# Altium PCB K10P100最小系统V1.0.PcbDoc (part 2 of 2)
Units mm, origin at the board's own origin, x right, y up, seen from the top; angles counter-clockwise.
Board outline 152.4 x 101.6 mm, 2 copper layers (Top Layer, Bottom Layer); 129 components, 121 nets, 483 pads, 257 vias.
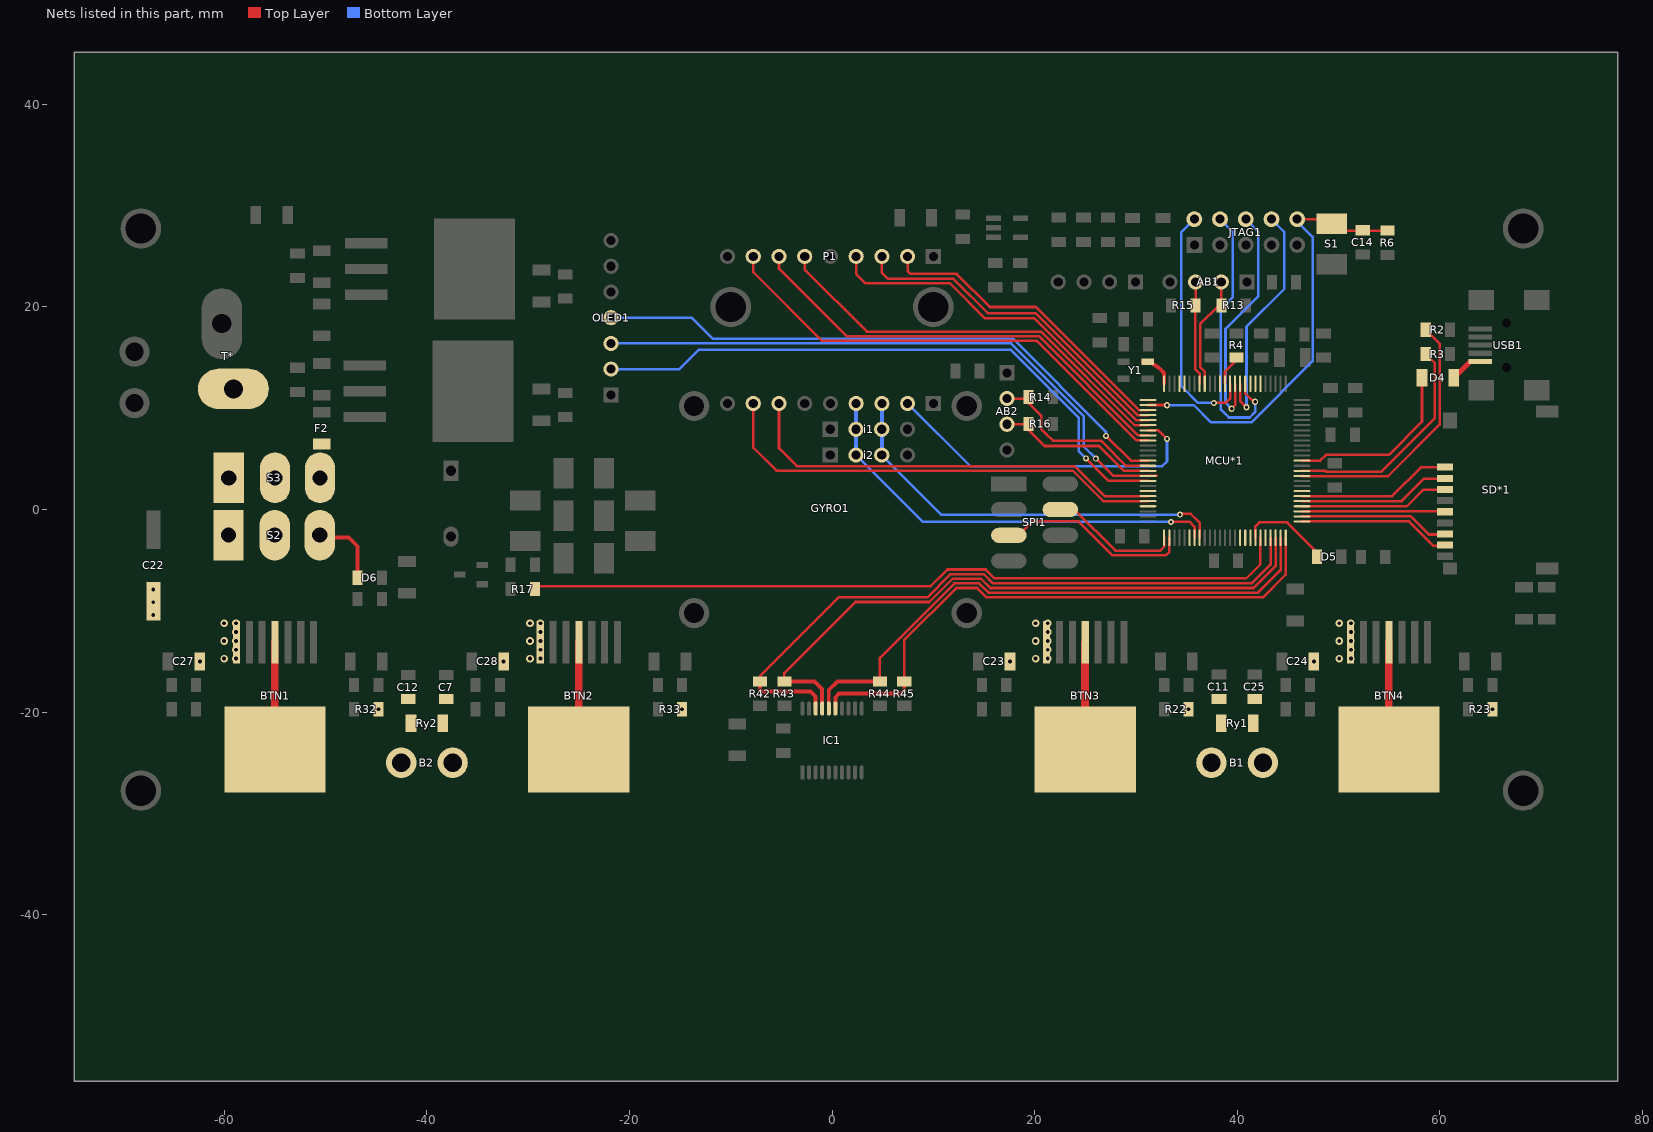
[diagram p2: the nets of this part, all layers, seen from the top]

## Via types
v1: diameter 0.762, hole 0.381, Top Layer to Bottom Layer, 136 vias
v2: diameter 0.864, hole 0.508, Top Layer to Bottom Layer, 83 vias
v3: diameter 0.61, hole 0.33, Top Layer to Bottom Layer, 25 vias
v4: diameter 0.864, hole 0.381, Top Layer to Bottom Layer, 9 vias
v5: diameter 1, hole 1, Top Layer to Bottom Layer, 2 vias
v6: diameter 0.457, hole 0.3, Top Layer to Bottom Layer, 1 vias
v7: diameter 0.61, hole 0.381, Top Layer to Bottom Layer, 1 vias

## Nets (pads, with @x,y where several pads share a name; then routed paths per layer and width w, separated by ;. In a path a pad name is that pad's centre, name@x,y a point inside that pad or via, vN(x,y) a via of type N, cw(c..) or ccw(c..) an arc to the next point about the centre after c; other vN are vias at no path point) (continued)
OLEDDC: MCU*1.67 OLED1.2 | length 61.1
  Top Layer w0.254: v3(25.075,5.05) 27.3,2.825 MCU*1.67@31.2,2.825
  Bottom Layer w0.254: OLED1.2@-21.825,13.865 -15.082,13.865 -13.159,15.787 17.641,15.787 24.35,9.078 24.35,5.775 v3(25.075,5.05)
OLEDMISO: MCU*1.63 OLED1.4 | length 59.1
  Top Layer w0.254: v3(27.05,7.275) 29.5,4.825 MCU*1.63@31.2,4.825
  Bottom Layer w0.254: OLED1.4@-21.825,18.945 -13.87,18.945 -11.8,16.875 17.85,16.875 27.05,7.675 v3(27.05,7.275)
OLEDRST: MCU*1.66 OLED1.3 | length 61
  Top Layer w0.254: v3@26.063,5.037 27.775,3.325 MCU*1.66@31.2,3.325 32.033,3.325
  Bottom Layer w0.254: OLED1.3@-21.825,16.405 17.67,16.405 24.85,9.225 24.85,6.25 v3@26.063,5.037
  other v3: 26.05,5.025
OUT1: B2.1 BTN1.4 BTN1.8 C12.1 Ry2.1 | length 10.6
  Top Layer w0.762: BTN1.8@-55.025,-23.684 BTN1.4@-55.025,-13.123
OUT2: B2.2 BTN2.4 BTN2.8 C7.1 Ry2.2 | length 10.6
  Top Layer w0.762: BTN2.8@-25.025,-23.684 BTN2.4@-25.025,-13.123
OUT3: B1.1 BTN3.4 BTN3.8 C11.1 Ry1.1 | length 10.6
  Top Layer w0.762: BTN3.8@24.975,-23.684 BTN3.4@24.975,-13.123
OUT4: B1.2 BTN4.4 BTN4.8 C25.2 Ry1.2 | length 10.6
  Top Layer w0.762: BTN4.8@54.975,-23.684 BTN4.4@54.975,-13.123
PCS0: MCU*1.76 SPI1.6 | length 13
  Top Layer w0.254: SPI1.6@22.538,-0.003 22.56,-0.025 23.95,-0.025 27.975,-4.05 32.425,-4.05 32.8,-3.675 MCU*1.76@32.8,-2.775
PTA0: JTAG1.4 MCU*1.34 | length 27.2
  Top Layer w0.254: MCU*1.34@40.8,12.425 40.8,11.45 41.6,10.65 v3(41.775,10.65)
  Bottom Layer w0.254: JTAG1.4@38.31,28.67 39.55,27.43 39.55,20.95 38.393,19.793 38.393,9.882 39.185,9.09 40.813,9.09 ; 40.798,9.075 40.813,9.09 ; v3@41.6,10.65 v3(41.775,10.65) 41.775,9.622 41.243,9.09 40.813,9.09
PTA1: JTAG1.8 MCU*1.35 | length 23.2
  Top Layer w0.254: MCU*1.35@40.3,12.425 40.3,10.719 v3(40.922,10.097)
  Bottom Layer w0.254: v3(40.922,10.097) 40.922,18.072 44.65,21.8 44.65,27.41 JTAG1.8@43.39,28.67
PTA2: JTAG1.6 MCU*1.36 | length 23.5
  Top Layer w0.254: v3(39.45,9.95) 39.8,10.3 39.8,10.975 MCU*1.36@39.8,12.425
  Bottom Layer w0.254: v3(39.45,9.95) 38.85,10.55 38.85,17.85 42.1,21.1 42.1,27.42 JTAG1.6@40.85,28.67
PTA3: JTAG1.2 MCU*1.37 | length 24.2
  Top Layer w0.254: v3(37.7,10.525) 38.85,10.525 39.3,10.975 ; 39.3,10.925 39.3,10.975 ; MCU*1.37@39.3,12.425 39.3,10.975
  Bottom Layer w0.254: JTAG1.2@35.77,28.67 34.5,27.4 34.5,12.175 36.15,10.525 v3(37.7,10.525)
PTA4: MCU*1.38 R4.2 | length 3.1
  Top Layer w0.254: MCU*1.38@38.8,12.425 38.8,13.625 39.95,14.775 R4.2@39.95,15
PTA5: MCU*1.39
PTA12: AB1.2 MCU*1.42 R13.1 | length 11.6
  Top Layer w0.254: MCU*1.42@36.8,12.425 36.8,13.625 36.35,14.075 36.35,18.3 38.185,20.135 R13.1@38.435,20.135 ; AB1.2@38.435,22.475 R13.1@38.435,20.135 ; R13.1@38.45,20.15 R13.1@38.435,20.135 ; R13.1@38.475,19.85 38.435,19.89 R13.1@38.435,20.135
PTA13: AB1.3 MCU*1.43 R15.1 | length 10.2
  Top Layer w0.254: AB1.3@35.895,22.475 35.895,20.17 R15.1@35.875,20.15 35.875,13.85 36.3,13.425 MCU*1.43@36.3,12.425
PTA16: MCU*1.46
PTA17: MCU*1.47
PTA18: MCU*1.50 Y1.3 | length 3.5
  Top Layer w0.381: Y1.3@30.7,14.576 cw(c30.7,12.163) 32.406,13.869 32.675,13.6 cw(c32.373,13.298) 32.8,13.298 MCU*1.50@32.8,12.425
PTA19: MCU*1.51
PTB0: MCU*1.53 P1.2 | length 30.9
  Top Layer w0.254: P1.2@7.46,25 7.46,23.54 7.725,23.275 12.3,23.275 15.575,20 20.136,20 30.311,9.825 MCU*1.53@31.2,9.825
PTB1: MCU*1.54 P1.3 | length 33.7
  Top Layer w0.254: P1.3@4.92,25 4.92,23.38 5.513,22.787 11.988,22.787 15.375,19.4 20.09,19.4 30.165,9.325 MCU*1.54@31.2,9.325
PTB2: MCU*1.55 P1.4 | length 36.5
  Top Layer w0.254: P1.4@2.38,25 2.38,23.245 3.295,22.33 11.67,22.33 15.125,18.875 19.968,18.875 30.018,8.825 MCU*1.55@31.2,8.825
PTB3: MCU*1.56 P1.6 | length 41.6
  Top Layer w0.254: P1.6@-2.7,25 -2.7,23.725 3.45,17.575 20.622,17.575 29.872,8.325 MCU*1.56@31.2,8.325
PTB9: GYRO1.2 MCU*1.57 | length 32.8
  Top Layer w0.254: MCU*1.57@31.2,7.825 32.225,7.825 v3(33.075,6.975)
  Bottom Layer w0.254: GYRO1.2@7.46,10.475 13.66,4.275 32.6,4.275 33.075,4.75 v3(33.075,6.975)
PTB10: MCU*1.58 P1.7 | length 44.5
  Top Layer w0.254: P1.7@-5.24,25 -5.24,23.79 1.432,17.118 20.432,17.118 30.225,7.325 MCU*1.58@31.2,7.325
PTB11: MCU*1.59 P1.8 | length 47.4
  Top Layer w0.254: P1.8@-7.78,25 -7.78,23.455 -0.986,16.661 20.214,16.661 30.05,6.825 MCU*1.59@31.2,6.825
PTB18: AB2.2 MCU*1.64 R14.1 | length 17.9
  Top Layer w0.254: AB2.2@17.275,10.96 19.26,10.96 R14.1@19.4,11.1 19.4,10.5 20.675,9.225 20.675,7.922 20.97,7.627 20.97,7.613 21.163,7.42 21.177,7.42 21.797,6.8 26.55,6.8 29.035,4.315 31.19,4.315 MCU*1.64@31.2,4.325
PTB19: AB2.3 MCU*1.65 R16.1 | length 16.3
  Top Layer w0.254: AB2.3@17.275,8.42 R16.1@19.12,8.42 ; R16.1@19.4,8.35 R16.1@19.4,8.45 ; R16.1@19.4,8.7 R16.1@19.4,8.45 ; MCU*1.65@31.2,3.825 28.825,3.825 26.375,6.275 20.975,6.275 19.4,7.85 R16.1@19.4,8.45
PTB23: MCU*1.69
PTC0: GYRO1.7 MCU*1.70 | length 42.8
  Top Layer w0.254: GYRO1.7@-5.24,10.475 -5.24,6.065 -3.47,4.295 23.954,4.295 26.924,1.325 MCU*1.70@31.2,1.325
PTC1: GYRO1.8 MCU*1.71 | length 45.5
  Top Layer w0.254: GYRO1.8@-7.78,10.475 -7.78,6.13 -5.485,3.835 23.768,3.835 26.778,0.825 MCU*1.71@31.2,0.825
PTC2: MCU*1.72
PTC5: MCU*1.77 SPI1.3 | length 19
  Top Layer w0.254: SPI1.3@17.8,-2.5 18.475,-2.5 19.8,-1.175 24.325,-1.175 27.657,-4.507 32.968,-4.507 33.3,-4.175 MCU*1.77@33.3,-2.775
PTC9: MCU*1.81
PTC10: GYRO1.4 i1.2 i2.2 MCU*1.82 | length 42.6
  Top Layer w0.254: v3(33.475,-1.225) 33.45,-1.2 35.286,-1.2 35.8,-1.714 MCU*1.82@35.8,-2.775
  Top Layer w0.381: i2.2@2.365,5.375 i2.2@2.38,5.39
  Bottom Layer w0.254: i2.2@2.365,5.375 8.965,-1.225 v3(33.475,-1.225)
  Bottom Layer w0.381: i2.2@2.38,5.39 GYRO1.4@2.38,10.475
PTC11: GYRO1.3 i1.3 i2.3 MCU*1.83 | length 40.8
  Top Layer w0.254: v3(34.35,-0.5) 34.435,-0.415 35.415,-0.415 36.3,-1.3 MCU*1.83@36.3,-2.775
  Top Layer w0.381: i2.3@4.905,5.375 i2.3@4.92,5.39
  Bottom Layer w0.254: i2.3@4.905,5.375 10.78,-0.5 v3(34.35,-0.5)
  Bottom Layer w0.381: i2.3@4.92,5.39 GYRO1.3@4.92,10.475
PTC17: MCU*1.91
PTC18: MCU*1.92
PTD0: MCU*1.93
PTD1: D5.2 MCU*1.94 | length 9
  Top Layer w0.254: MCU*1.94@41.8,-2.775 41.8,-1.675 42.2,-1.275 44.925,-1.275 47.875,-4.225 D5.2@47.875,-4.675
PTD2: MCU*1.95 R17.2 | length 76
  Top Layer w0.254: R17.2@-29.35,-7.85 -29.075,-7.575 9.725,-7.575 11.381,-5.919 15.169,-5.919 16.05,-6.8 40.9,-6.8 42.3,-5.4 MCU*1.95@42.3,-2.775
PTD3: MCU*1.96
PTD4: IC1.18 MCU*1.97 R42.1 | length 66.6
  Top Layer w0.254: R42.1@-7.1,-16.975 -7.1,-16.419 0.644,-8.675 9.408,-8.675 11.707,-6.376 14.979,-6.376 15.861,-7.257 41.468,-7.257 43.3,-5.425 MCU*1.97@43.3,-2.775
  Top Layer w0.381: R42.1@-7.1,-16.975 -7.1,-17.8 -6.925,-17.975 -4.126,-17.975 -4.123,-17.972 -2.128,-17.972 -1.627,-18.473 IC1.18@-1.627,-19.644
PTD5: IC1.17 MCU*1.98 R43.1 | length 63.2
  Top Layer w0.254: R43.1@-4.7,-16.975 -4.7,-16.125 2.293,-9.132 9.598,-9.132 11.897,-6.833 14.707,-6.833 15.624,-7.75 41.625,-7.75 43.8,-5.575 MCU*1.98@43.8,-2.775
  Top Layer w0.381: R43.1@-4.7,-16.975 -1.725,-16.975 -0.976,-17.724 -0.976,-19.644 IC1.17@-0.971,-19.65
PTD6: IC1.16 MCU*1.99 R44.1 | length 56.7
  Top Layer w0.254: R44.1@4.725,-16.975 4.725,-14.651 12.086,-7.29 14.518,-7.29 15.435,-8.207 42.068,-8.207 44.3,-5.975 MCU*1.99@44.3,-2.775
  Top Layer w0.381: IC1.16@-0.321,-19.65 -0.321,-17.821 0.525,-16.975 R44.1@4.725,-16.975
PTD7: IC1.15 MCU*1.100 R45.1 | length 57.9
  Top Layer w0.254: R45.1@7.125,-16.975 7.125,-12.898 12.275,-7.748 14.329,-7.748 15.245,-8.664 42.561,-8.664 44.8,-6.425 MCU*1.100@44.8,-2.775
  Top Layer w0.381: IC1.15@0.329,-19.65 0.335,-19.644 0.335,-18.54 0.7,-18.175 6.8,-18.175 7.125,-17.85 R45.1@7.125,-16.975
PTE0: MCU*1.1 SD*1.8 | length 15.1
  Top Layer w0.254: MCU*1.1@46.4,-1.175 56.971,-1.175 59.36,-3.565 SD*1.8@60.518,-3.565
PTE1: MCU*1.2 SD*1.7 | length 14.9
  Top Layer w0.254: MCU*1.2@46.4,-0.675 57.146,-0.675 58.935,-2.465 SD*1.7@60.518,-2.465
PTE2: MCU*1.3 SD*1.5 | length 14.2
  Top Layer w0.254: MCU*1.3@46.4,-0.175 60.429,-0.175 SD*1.5@60.518,-0.265
PTE3: MCU*1.4 SD*1.3 | length 14.3
  Top Layer w0.254: MCU*1.4@46.4,0.325 56.75,0.325 58.385,1.96 SD*1.3@59.993,1.96
PTE4: MCU*1.5 SD*1.2 | length 14.5
  Top Layer w0.254: MCU*1.5@46.4,0.825 56.225,0.825 58.46,3.06 SD*1.2@59.993,3.06
PTE5: MCU*1.6 SD*1.1 | length 14.8
  Top Layer w0.254: MCU*1.6@46.4,1.325 55.3,1.325 58.135,4.16 SD*1.1@59.993,4.16
PTE6: MCU*1.7
PTE24: MCU*1.31
PTE25: MCU*1.32
PTE26: MCU*1.33
RESET: C14.2 JTAG1.10 MCU*1.52 R6.1 S1.2 | length 44.2
  Top Layer w0.254: MCU*1.52@31.2,10.325 32.9,10.325 33.05,10.475 33.075,10.45 v3(33.075,10.3) ; JTAG1.10@45.93,28.67 48.906,28.67 S1.2@49.351,28.225 50.026,27.55 R6.1@54.85,27.55
  Bottom Layer w0.254: v3(33.075,10.3) 33.075,10.45 32.925,10.3 35.728,10.3 37.411,8.618 41.418,8.618 47.45,14.65 47.45,26.925 45.93,28.445 JTAG1.10@45.93,28.67
USB0_DM: MCU*1.11 R3.2 | length 22
  Top Layer w0.254: MCU*1.11@46.4,3.825 48.683,3.825 48.763,3.745 54.245,3.745 59.531,9.031 59.531,14.444 R3.2@58.625,15.35
USB0_DP: MCU*1.10 R2.2 | length 25.7
  Top Layer w0.254: MCU*1.10@46.4,3.325 46.437,3.288 54.901,3.288 59.988,8.375 59.988,16.387 R2.2@58.625,17.75
USB5V: D4.1 USB1.1 | length 3.3
  Top Layer w0.508: D4.1@61.405,13.006 63.033,14.634 USB1.1@63.991,14.634
VBAT: S2.0 S2.1 S3.0 S3.1 T*.1
VCC: F2.1 S3.2
VCC_M: BTN1.7 BTN2.7 BTN3.7 BTN4.7 C22.1 C23.1 C24.1 C27.1 C28.1 D6.1 R22.2 R23.1 R32.2 R33.1 S2.2 | length 7.3
  Top Layer w0.381: S2.2@-50.583,-2.525 -50.358,-2.75 -47.725,-2.75 -46.85,-3.625 D6.1@-46.85,-6.75
  other v1: -44.8,-19.725 -14.8,-19.725 35.2,-19.725 65.2,-19.725 -62.425,-15 -32.425,-15 17.575,-15 47.575,-15 -60.025,-14.725 -58.85,-14.725 -29.825,-14.725 -28.8,-14.725 20.1,-14.725 21.3,-14.725 50.075,-14.725 51.225,-14.725 -58.85,-13.85 -28.8,-13.85 21.3,-13.85 51.225,-13.85 -60.025,-12.975 -58.85,-12.975 -29.825,-12.975 -28.8,-12.975 20.1,-12.975 21.3,-12.975 50.075,-12.975 51.225,-12.975 -58.85,-12.1 -28.8,-12.1 21.3,-12.1 51.225,-12.1 -60.025,-11.225 -58.85,-11.225 -29.825,-11.225 -28.8,-11.225 20.1,-11.225 21.3,-11.225 50.075,-11.225 51.225,-11.225 -67.025,-10.4 -67.025,-9.15 -67.025,-7.9
VREGIN: D4.2 MCU*1.13 | length 17.8
  Top Layer w0.254: MCU*1.13@46.4,4.825 48.183,4.825 48.763,5.405 55.005,5.405 58.275,8.675 58.255,8.695 D4.2@58.255,13.006
pads on no net: GYRO1.0 GYRO1.1 GYRO1.9 MCU*1.14 MCU*1.15 MCU*1.16 MCU*1.17 MCU*1.18 MCU*1.19 MCU*1.20 MCU*1.21 MCU*1.26 MCU*1.27 SD*1.10 SD*1.11 SD*1.12 SD*1.13 USB1.5 USB1.6 USB1.7 USB1.8 USB1.9 USB1.MH1 USB1.MH2 Y1.1
copper on no net:
  other v5: 71.018,-3.015 71.018,4.985

## Polygon pours and split planes (outlines as drawn)
EGND on Top Layer "Keep-Out Layer-No Net" (solid, pour order 46): -62.975,-1.325 -62.975,-4.425 -62,-5.4 -63.05,-6.45 -65.95,-6.45 -65.95,-5.225 -66.25,-4.925
GND on Top Layer "Keep-Out Layer-No Net" (solid, remove dead copper, pour order 47): -55.125,30.25 -55.125,14.3 -54.55,13.725 -54.55,9.55 -53.1,8.1 -52.75,7.75 -48.6,7.75 -47.625,6.775 -47.625,-1.925 -44.825,-4.725 -43.65,-4.725 -38.35,-10.025 -27.425,-10.025 72.5,-10.025 72.525,-10 72.25,-9.725 72.25,30.325
NetC35_1 on Top Layer "Keep-Out Layer-No Net" (solid, remove dead copper, pour order 48): -52.05,23.375 -51.6,22.925 -51.275,22.925 -49.55,22.925 -49.525,22.925 -48.325,21.725 -43.9,21.725 -43.9,20.7 -48.1,20.7 -49.025,19.775 -51.275,19.775 -51.275,20.15 -53.5,22.375 -53.5,23.375
NetC31_1 on Top Layer "Keep-Out Layer-No Net" (solid, remove dead copper, pour order 74): -44.05,8.65 -44.025,8.675 -44.025,9.6 -48.375,9.6 -49.475,10.7 -49.475,11.675 -49.475,12.05 -49.625,12.2 -49.675,12.25 -53.45,12.25 -53.525,12.25 -53.65,12.125 -53.7,12.075 -53.7,11.125 -53.6,11.025 -53.575,11 -51.45,11 -51.4,11 -51.35,10.95 -51.3,10.9 -51.3,9.15 -51.3,9.125 -51.225,9.05 -49.675,9.05 -49.225,8.6
VCC on Top Layer "Keep-Out Layer-No Net" (solid, remove dead copper, pour order 71): -51.3,7 -51.275,6.975 -49.525,6.975 -49,6.45 -49,2.025 -52.15,2.025 -52.15,6.15 -51.3,7
VBAT on Top Layer "Keep-Out Layer-No Net" (solid, remove dead copper, pour order 69): -62.625,7.225 -62.625,-3.6 -61.15,-5.075 -57,-5.075 -57,7.1 -57.475,7.575
VBAT on Top Layer "Keep-Out Layer-No Net" (solid, remove dead copper, pour order 67): -62.625,11.975 -62.625,7.225 -61.075,5.675 -61.15,5.6 -61.15,-5.075 -54.4,-5.075 -53.525,-4.2 -53.4,-4.075 -53.4,4.4 -53.4,4.925 -55.025,6.55 -55.55,7.075 -55.55,12.075
VCC_M on Top Layer "Keep-Out Layer-No Net" (solid, remove dead copper, pour order 65): 47,-14.075 50.1,-10.975 51.575,-10.975 51.575,-15.275 50.9,-15.95 47,-15.95
VCC_M on Top Layer "Keep-Out Layer-No Net" (solid, remove dead copper, pour order 63): 17,-14.075 20.125,-10.95 21.6,-10.95 21.6,-15.275 20.95,-15.925 17,-15.925
VCC_M on Top Layer "Keep-Out Layer-No Net" (solid, remove dead copper, pour order 60): -33,-14.075 -29.9,-10.975 -28.4,-10.975 -28.4,-15.3 -29.025,-15.925 -33,-15.925
VCC_M on Top Layer "Keep-Out Layer-No Net" (solid, remove dead copper, pour order 56): -67.725,-7.125 -67.7,-7.1 -66.25,-7.1 -65.05,-7.1 -61.4,-10.75 -61.175,-10.975 -58.425,-10.975 -58.425,-15.475 -58.8,-15.85 -58.85,-15.9 -63,-15.9 -63,-14.075 -66.1,-10.975 -67.775,-10.975
OUT1 on Top Layer "Keep-Out Layer-No Net" (solid, remove dead copper, pour order 55): -44.352,-28.025 -43.152,-28.025 ccw(c-43.152,-25.485) -41.356,-27.281 -40.975,-26.9 -40.975,-21.4 -40.975,-20.15 ccw(c-41.035,-20.21) -41.035,-20.125 -42.175,-20.125 ccw(c-42.175,-21.513) -43.157,-20.532 -43.325,-20.7 -44.181,-21.556 cw(c-45.977,-19.76) -45.977,-22.3 -47.525,-22.3
OUT2 on Top Layer "Keep-Out Layer-No Net" (solid, remove dead copper, pour order 54): -35.61,-28.036 -36.412,-28.036 cw(c-36.412,-25.496) -38.208,-27.292 -38.9,-26.6 cw(c-38.659,-26.359) -39,-26.359 -39,-20.15 -37.8,-20.15 cw(c-37.8,-21.84) -36.605,-20.645 -36.2,-21.05 -35.969,-21.281 ccw(c-34.173,-19.485) -34.173,-22.025 -27.825,-22.025 cw(c-30.118,-22.025) -28.497,-23.647 -30.8,-25.95
OUT3 on Top Layer "Keep-Out Layer-No Net" (solid, remove dead copper, pour order 53): 35.273,-27.975 35.798,-27.975 ccw(c35.798,-25.435) 37.594,-27.231 39.025,-25.8 ccw(c38.904,-25.679) 39.075,-25.679 39.075,-20.2 37.946,-20.2 cw(c37.946,-20.029) 37.825,-20.15 ccw(c37.825,-21.357) 36.971,-20.504 36.95,-20.525 35.969,-21.506 cw(c34.173,-19.71) 34.173,-22.25 32.8,-22.25 30.581,-22.25 ccw(c30.581,-22.506) 30.4,-22.325
OUT4 on Top Layer "Keep-Out Layer-No Net" (solid, remove dead copper, pour order 52): 41.118,-25.77 42.579,-27.231 ccw(c44.375,-25.435) 44.375,-27.975 44.927,-27.975 44.927,-26.793 cw(c47.467,-26.793) 45.671,-24.997 46.918,-23.75 ccw(c46.436,-24.232) 46.436,-23.55 41.25,-23.55
OUT4 on Top Layer "Keep-Out Layer-No Net" (solid, remove dead copper, pour order 51): 40.939,-25.1 ccw(c40.911,-25.072) 40.95,-25.072 40.95,-20.15 41.814,-20.15 cw(c41.814,-21.686) 42.9,-20.6 43.706,-21.406 ccw(c45.502,-19.61) 45.502,-22.15 47.1,-22.15 47.1,-22.773 cw(c44.56,-22.773) 46.356,-24.569 45,-25.925
OUT4 on Top Layer "Keep-Out Layer-No Net" (solid, remove dead copper, pour order 49): 49.9,-19.35 46.544,-22.706 cw(c44.748,-20.91) 44.748,-23.45 42.5,-23.45 ccw(c42.5,-24.959) 41.433,-23.892 41.25,-24.075 ccw(c41.974,-24.799) 40.95,-24.799 40.95,-25.1 ccw(c42.278,-25.1) 41.339,-26.039 41.575,-26.275 ccw(c42.36,-25.49) 42.36,-26.6 42.5,-26.6 43.131,-27.231 ccw(c44.927,-25.435) 44.927,-27.975 60.075,-27.975 60.075,-19.46 ccw(c59.99,-19.46) 60.05,-19.4
OUT3 on Top Layer "Keep-Out Layer-No Net" (solid, remove dead copper, pour order 45): 30.025,-19.45 33.281,-22.706 ccw(c35.077,-20.91) 35.077,-23.45 37.325,-23.45 37.326,-23.45 cw(c37.326,-25.499) 38.775,-24.05 cw(c38.111,-24.714) 39.05,-24.714 39.05,-25.45 38.205,-26.295 cw(c37.65,-25.74) 37.65,-26.525 36.944,-27.231 cw(c35.148,-25.435) 35.148,-27.975 19.95,-27.975 19.95,-19.375
OUT2 on Top Layer "Keep-Out Layer-No Net" (solid, remove dead copper, pour order 44): -30,-19.375 -33.281,-22.656 cw(c-35.077,-20.86) -35.077,-23.4 -37.5,-23.4 ccw(c-37.5,-24.728) -38.439,-23.789 -38.925,-24.275 ccw(c-38.623,-24.577) -39.05,-24.577 -39.05,-25.275 ccw(c-38.205,-25.275) -38.803,-25.872 -38.375,-26.3 -37.394,-27.281 ccw(c-35.598,-25.485) -35.598,-28.025 -19.925,-28.025 -19.925,-19.41 ccw(c-20.01,-19.41) -19.95,-19.35
OUT1 on Top Layer "Keep-Out Layer-No Net" (solid, remove dead copper, pour order 43): -49.9,-19.45 ccw(c-49.779,-19.45) -49.865,-19.535 -47.075,-22.325 -46.744,-22.656 ccw(c-44.948,-20.86) -44.948,-23.4 -42.6,-23.4 cw(c-42.6,-24.969) -41.49,-23.86 -41.075,-24.275 cw(c-41.377,-24.577) -40.95,-24.577 -40.95,-25.375 cw(c-41.372,-25.375) -41.074,-25.674 -41.725,-26.325 -42.681,-27.281 cw(c-44.477,-25.485) -44.477,-28.025 -53.9,-28.025 -58.198,-28.025 cw(c-58.198,-25.485) -59.994,-27.281 -60,-27.275 cw(c-59.94,-27.215) -60.025,-27.215 -60.025,-19.375
OUT1 on Top Layer "Keep-Out Layer-No Net" (solid, pour order 66): -42.55,-18.25 -42.55,-19.054 cw(c-44.617,-19.054) -43.156,-20.516 ccw(c-43.117,-20.478) -43.117,-20.532 -40.972,-20.532 -40.972,-18.62 ccw(c-41.495,-18.62) -41.125,-18.25
OUT2 on Top Layer "Keep-Out Layer-No Net" (solid, pour order 68): -37.375,-18.25 -37.375,-18.823 ccw(c-34.835,-18.823) -36.631,-20.619 -36.2,-21.05 cw(c-36.321,-20.929) -36.321,-21.1 -38.925,-21.1 cw(c-38.925,-21.04) -38.968,-21.082 -39,-21.05 -39,-18.647 cw(c-38.403,-18.647) -38.825,-18.225
OUT3 on Top Layer "Keep-Out Layer-No Net" (solid, pour order 70): 37.475,-18.2 37.475,-18.948 cw(c34.935,-18.948) 36.731,-20.744 36.45,-21.025 cw(c36.571,-21.146) 36.571,-20.975 39.075,-20.975 39.075,-18.562 ccw(c38.563,-18.562) 38.925,-18.2
OUT4 on Top Layer "Keep-Out Layer-No Net" (solid, pour order 72): 42.45,-18.2 42.45,-19.115 ccw(c44.99,-19.115) 43.194,-20.911 43.697,-21.415 40.95,-21.415 40.95,-18.441 cw(c41.291,-18.441) 41.05,-18.2
EGND on Top Layer "Keep-Out Layer-No Net" (solid, pour order 77): -72.5,31 -72.5,31.025 -55.575,31.025 -55.5,31.025 -55.5,14.675 -55.5,14.75 -63.05,14.75 -62.975,14.75 -62.975,-4.625 -63.375,-5.025 -66.425,-5.025 -66.975,-5.025 -68.3,-6.35 -68.3,-10.75 -67.975,-11.075 -67.9,-11.15 -66.2,-11.15 -63.65,-13.7 -63.6,-13.75 -63.6,-20.125 -63.6,-20.525 -63.45,-20.675 -62.05,-20.675 -61.075,-19.7 -61.025,-19.65 -60.275,-19.65 -60.275,-31 -60.3,-31.025 -60.325,-31 -72.5,-31
EGND on Top Layer "Keep-Out Layer-No Net" (solid, remove dead copper, pour order 79): -65.95,-5.4 -43.55,-5.4 -42.1,-6.85 -39.6,-9.35 72.55,-9.35 72.55,-30.775 72.575,-30.8 72.4,-30.975 -65.85,-30.975
GND on Bottom Layer "Keep-Out Layer-No Net" (solid, remove dead copper, pour order 50): -41.475,30.25 -41.475,-6.925 -40.475,-7.925 -40.35,-8.05 -31.125,-8.05 -17.425,-8.05 -15.3,-5.925 -14.9,-5.525 72.5,-5.525 72.5,30.25
VCC_M on Bottom Layer "Keep-Out Layer-No Net" (solid, pour order 84): 21.625,-10.925 21.625,-18.625 17.65,-18.625 17.275,-18.25 16.975,-17.95 16.975,-14.05 17,-14.05 20.1,-10.95
VCC_M on Bottom Layer "Keep-Out Layer-No Net" (solid, pour order 83): -28.35,-10.95 -28.35,-17.775 -29,-18.425 -29.475,-17.95 -32.825,-17.95 -33.05,-17.725 -33.05,-14.05 -33.025,-14.05 -29.925,-10.95
VCC_M on Bottom Layer "Keep-Out Layer-No Net" (solid, pour order 82): -58.425,-10.808 -57.367,-9.75 -49.85,-9.75 -49.075,-8.975 -49.075,-8.725 -49.075,-6.4 -50.1,-5.375 -57.05,-5.375 -65.925,-5.375 -67.75,-7.2 -64.075,-10.875 -63.15,-10.875
VCC_M on Bottom Layer "Keep-Out Layer-No Net" (solid, pour order 78): -63,-14.125 -63,-19.925 -61.2,-21.725 -31.5,-21.725 49.45,-21.725 51.575,-19.6 51.625,-19.55 51.625,-10.95 50.1,-10.95 47,-14.05 47,-17.725 -57.275,-17.725 -58.225,-16.775 -58.425,-16.575 -58.425,-14.075
VCC_M on Bottom Layer "Keep-Out Layer-No Net" (solid, pour order 75): -65.75,-7.125 -67.75,-7.125 -67.775,-7.15 -67.75,-7.175 -67.75,-11.025 -59.65,-11.025 -59.525,-10.9 -59.25,-10.625 -59.25,-7.2
VCC_M on Bottom Layer "Keep-Out Layer-No Net" (solid, remove dead copper, pour order 73): -67.6,-7.15 -54.725,-7.15 -52.125,-4.55 -52.125,-2.35 -49.025,-2.35 -49.075,-2.4 -49.075,-8.725 -57.7,-8.725 -58.375,-9.4 -58.425,-9.45 -58.425,-15.425 -58.425,-15.5 -58.85,-15.925 -63,-15.925 -63,-14.125 -63.05,-14.075 -66.1,-11.025 -67.775,-11.025
VCC_M on Bottom Layer "Keep-Out Layer-No Net" (solid, pour order 57): 65.675,-19.025 65.675,-20.475 49.05,-20.475 48.15,-19.575 48.7,-19.025 65.675,-19.025
EGND on Bottom Layer "Keep-Out Layer-No Net" (solid, pour order 58): -57.15,-10.125 -57.85,-10.825 -57.85,-16.425 -57.075,-17.2 -56.975,-17.3 -34.425,-17.3 -33.4,-17.3 -33.3,-17.2 -33.3,-14.975 -33.3,-13.7 -30.2,-10.6 -30.1,-10.5 -28.125,-10.5 -28.075,-10.5 -27.85,-10.725 -27.775,-10.8 -27.775,-17.025 -27.775,-17.05 -27.55,-17.275 -27.475,-17.35 -24.825,-17.35 16.275,-17.35 16.575,-17.05 16.575,-14.75 16.575,-13.575 19.675,-10.475 19.775,-10.375 20.875,-10.375 21.775,-10.375 22.075,-10.675 22.2,-10.8 22.2,-16.625 22.2,-16.975 22.425,-17.2 22.55,-17.325 24.7,-17.325 46.45,-17.325 46.675,-17.1 46.675,-15.225 46.675,-13.925 46.675,-13.35 49.5,-10.525 49.6,-10.425 51.75,-10.425 52.125,-10.8 52.45,-11.125 52.45,-18.075 52.45,-18.2 52.7,-18.45 52.95,-18.7 72.5,-18.7 72.5,-9.375 -48.575,-9.375 -48.825,-9.375 -49.575,-10.125
VCC_M on Bottom Layer "Keep-Out Layer-No Net" (solid, pour order 59): -67.75,-11.025 -67.75,-16.6 -67.75,-16.7 -63.3,-21.15 -61.275,-23.175 -1.275,-23.175 64.275,-23.175 65.625,-21.825 65.675,-21.775 65.675,-19.575 -58.7,-19.575 -60.65,-17.625 -61.4,-16.875 -61.4,-11.025
EGND on Bottom Layer "Keep-Out Layer-No Net" (solid, pour order 61): -55.675,14.325 -55.675,31.1 -55.7,31.125 -55.825,31 -72.5,31 -72.5,-31 -72.425,-31.075 -70.55,-31.075 -68.325,-28.85 -68.325,-13.45 -68.325,-6.325 -66.825,-4.825 -66.675,-4.975 -63.35,-4.975 -63.025,-4.65 -63.025,-0.8 -63.025,17.95 -62.675,18.3 -62.625,18.35 -56.2,18.35 -55.95,18.35 -55.675,18.625
EGND on Bottom Layer "Keep-Out Layer-No Net" (solid, pour order 62): -63.025,14.725 -58.925,14.725 -55.575,14.725 -54.95,14.1 -54.55,13.7 -54.55,7.65 -54.55,7.3 -53.775,6.525 -53.55,6.3 -49.2,6.3 -48.6,5.7 -48.3,5.4 -48.3,-7.75 -48.3,-8.85 -49.066,-9.616 -48.207,-10.475 -41.95,-10.475 -41.95,30.975 -41.975,31 -56.625,31
EGND on Bottom Layer "Keep-Out Layer-No Net" (solid, pour order 64): -68.325,-16.825 -61.625,-23.525 -55.075,-23.525 -45.275,-23.525 -44.725,-24.075 -44.725,-25.75 -44.725,-25.975 -43.725,-26.975 -43.45,-27.25 -36.625,-27.25 -36.525,-27.25 -35.275,-26 -35.225,-25.95 -35.225,-23.575 35.025,-23.575 35.325,-23.875 35.35,-23.9 35.35,-25.8 35.35,-25.975 36.375,-27 36.625,-27.25 43.3,-27.25 43.575,-27.25 44.7,-26.125 44.675,-26.1 44.675,-23.975 44.675,-23.9 44.975,-23.6 45.025,-23.55 50.875,-23.55 64.7,-23.55 66.05,-22.2 66.325,-21.925 66.325,-19.2 65.625,-18.5 65.775,-18.35 72.5,-18.35 72.5,-31 -72.5,-31 -72.5,-15.05
EGND on Bottom Layer "Keep-Out Layer-No Net" (solid, pour order 76): -56.725,14.725 -56.725,19.3 -64.375,19.3 -65.35,19.3 -65.35,14.75
EGND on Bottom Layer "Keep-Out Layer-No Net" (solid, pour order 80): -41.925,-6.025 -41.925,-7.075 -40.975,-8.025 -40.65,-8.35 2.3,-8.35 72.4,-8.35 72.45,-8.4 72.55,-8.5 72.55,-12.25 -41.225,-12.25 -44.975,-8.5
EGND on Bottom Layer "Keep-Out Layer-No Net" (solid, remove dead copper, pour order 81): -41.95,5.4 -41.95,-1.35 -41.95,-7.05 -40.65,-8.35 -40.575,-8.425 -17.2,-8.425 -15.625,-6.85 -14.95,-6.175 52.875,-6.175 72.425,-6.175 72.5,-6.1 72.55,-6.15 72.55,-15.45 -37.6,-15.45 -45.325,-7.725

## Keep-outs
Keep-Out Layer:
  lines w1: -72.5,-31 -72.5,31 72.5,31 72.5,-31 -72.5,-31

## Other copper
Top Layer:
  text "武汉理工大学" at 56.975,28.55 h1.27
  text "2016" at 59.5,27.4 h1.27
  text "张艳松" at 59.075,26.25 h1.27
  text "袁佳威" at 59,25 h1.27
  text "李锐戈" at 59.05,23.85 h1.27

## Silkscreen, mask and mechanical layers (free items; w line width, h text height)
Top Overlay:
  lines w0.127: -8.775,26.9 cw(c-7.675,26.9) -7.675,28 ; -5.55,28 -5.425,28 cw(c-5.425,26.975) -4.4,26.975 ; -3.3,27.05 cw(c-2.325,27.05) -2.325,28.025 -0.475,28.025 ; 0.125,28.025 2.225,28.025 cw(c2.225,26.925) 3.325,26.925 ; 4.375,27 cw(c5.175,27) 5.175,27.8 5.825,27.8 ; 6.825,27.75 7.514,27.75 cw(c7.514,27.085) 8.179,27.085
  text "A3" at 35.4,29.7 h0.76
  text "A0" at 37.95,29.7 h0.76
  text "A2" at 40.45,29.7 h0.76
  text "A1" at 43.1,29.7 h0.76
  text "RESET" at 45.1,29.7 h0.76
  text "10uF" at 21.575,29.675 h0.76
  text "1K" at 26.825,29.65 h0.76
  text "LED_B" at 28.75,29.625 h0.76
  text "104" at 32.2,29.6 h0.76
  text "0R" at -55.65,28.8 h0.76
  text "D" at 8.1,28.525 h0.76
  text "+" at 20.7,28.475 h0.76
  text "104" at 51.875,28.5 h0.76
  text "10K" at 54.325,28.475 h0.76
  text "D" at 25.125,27.5 h0.76 r90
  text "ADC1" at -7.1,27.475 h0.76
  text "ADC0" at -0.8,27.325 h0.76
  text "ADC1" at 5.425,27.075 h0.76
  text "F500mA" at 11.5,27.05 h0.76 r90
  text "AD14" at -6,26.55 h0.76
  text "AD15" at -8.5,26.525 h0.76
  text "AD13" at -3.325,26.525 h0.76
  text "AD12" at 1.65,26.5 h0.76
  text "AD9" at 4.3,26.45 h0.76
  text "AD8" at 6.95,26.425 h0.76
  text "GND" at -20.1,26.25 h0.76
  text "+" at 15.975,25.125 h0.76
  text "GND" at 37.875,24.7 h0.76
  text "GND" at 42.85,24.7 h0.76
  text "GND" at 45.425,24.7 h0.76
  text "GND" at 40.372,24.679 h0.76
  text "3.3V" at 35.025,24.625 h0.76
  text "GND" at 32.825,24.05 h0.76
  text "A13" at 35.4,24.025 h0.76
  text "A12" at 37.925,24.025 h0.76
  text "5V" at 40.5,24.025 h0.76
  text "3.3V" at -20.2,23.6 h0.76
  text "104" at -53.775,23.475 h0.76 r90
  text "10uF" at -48.675,23.125 h0.76 r90
  text "B1" at 4.7,22.825 h0.76
  text "B0" at 7.125,22.825 h0.76
  text "GND" at 9.45,22.825 h0.76
  text "B2" at 2.125,22.775 h0.76
  text "3.3V" at -0.7,22.75 h0.76
  text "B3" at -2.925,22.725 h0.76
  text "GND" at -10.775,22.7 h0.76
  text "B11" at -8.1,22.7 h0.76
  text "B10" at -5.65,22.7 h0.76
  text "+" at -53.9,22.575 h0.76 r90
  text "10uF" at 14.9,22.5 h0.76 r90
  text "+" at -48.175,22.3 h0.76 r90
  text "470pF" at 20.25,22.175 h0.76 r90
  text "B16" at -20.175,21.275 h0.76
  text "10pF" at -24.775,21.25 h0.76 r90
  text "10uF" at -29.95,21.15 h0.76 r90
  text "104" at 44.1,20.925 h0.76
  text "A14" at 29.375,20.2 h0.76
  text "A15" at 27,20.175 h0.76
  text "5V" at 21.95,20.125 h0.76
  text "GND" at 24.425,20.125 h0.76
  text "+" at -26.1,19.1 h0.76 r90
  text "+" at -27.75,19.075 h0.76 r90
  text "B17" at -20.2,18.85 h0.76
  text "3.3V" at -30.925,18.825 h1.27
  text "4K7" at 39,18.725 h0.76
  text "4K7" at 34.1,18.7 h0.76
  text "1M" at 45.05,18.4 h0.76
  text "103" at 32.525,18.325 h0.76 r90
  text "18pF" at 47.825,18.325 h0.76
  text "18pF" at 41.65,18.275 h0.76
  text "104" at 37.025,18.15 h0.76
  text "10K" at 39.35,18.1 h0.76
  text "F500mA" at -51.9,17.55 h0.76 r90
  text "33R" at 57.675,17.275 h0.76 r90
  text "B20" at -20.175,16.275 h0.76
  text "104" at 32.5,15.85 h0.76 r90
  text "10uH" at 25.7,15.125 h0.76
  text "33R" at 57.675,14.8 h0.76 r90
  text "104" at 12.8,14.675 h0.76
  text "ADC0" at -7.175,13.975 h0.76
  text "B21" at -20.15,13.625 h0.76
  text "SCL" at 1.85,13.225 h0.76
  text "SDA" at 4.375,13.225 h0.76
  text "5V" at 19.125,13.2 h0.76
  text "AD14" at -6.075,13.125 h0.76
  text "AD15" at -8.525,13.1 h0.76
  text "103" at 48.75,12.75 h0.76
  text "104" at 51.175,12.75 h0.76
  text "D" at 59.625,12.7 h0.76
  text "NC" at 9.625,12.6 h0.76
  text "C10" at 1.85,12.575 h0.76
  text "C11" at 4.425,12.575 h0.76
  text "B9" at 7.025,12.575 h0.76
  text "3.3V" at -3.45,12.5 h0.76
  text "GND" at -0.65,12.5 h0.76
  text "NC" at -10.65,12.475 h0.76
  text "C0" at -5.675,12.475 h0.76
  text "C1" at -8.125,12.45 h0.76
  text "4K7" at 19.975,12.275 h0.76
  text "104" at -53.95,12.225 h0.76 r90
  text "10uF" at -51.4,12.2 h0.76 r90
  text "+" at -54,11.35 h0.76 r90
  text "+" at -48.675,11.275 h0.76 r90
  text "B22" at -20.15,11.175 h0.76
  text "B18" at 22.8,10.75 h0.76
  text "102" at -24.85,9.7 h0.76 r90
  text "10uF" at -29.925,9.525 h0.76 r90
  text "4K7" at 20.075,9.45 h0.76
  text "B19" at 22.675,8.3 h0.76
  text "+" at -26,7.65 h0.76 r90
  text "GND" at 9.3,7.65 h0.76
  text "3.3V" at -3.225,7.625 h0.76
  text "+" at -28.5,7.325 h0.76 r90
  text "F1.5A" at -51.85,7.3 h0.76 r90
  text "5V" at -31.125,7.225 h1.27
  text "10uH" at 49.675,5.85 h0.76
  text "GND" at 19.075,5.6 h0.76
  text "C16" at -23.15,5.475 h0.76
  text "GND" at 9.2,5.25 h0.76
  text "3.3V" at -3.225,5.15 h0.76
  text "E5" at 58.3,3.875 h0.76
  text "GND" at 15.175,3.65 h0.76
  text "104" at 48.6,2.95 h0.76 r90
  text "E4" at 58.375,2.775 h0.76
  text "3.3V" at -44.65,2.725 h0.76
  text "3.3V" at 25.025,2.375 h0.76
  text "C15" at -30.875,2.275 h0.76
  text "C14" at -19.475,2.175 h0.76
  text "E3" at 58.375,1.7 h0.76
  text "C12" at -23.125,1.2 h0.76
  text "C3" at 15.3,0.9 h0.76
  text "3.3V" at 57.875,0.6 h0.76
  text "C4" at 25.375,-0.4 h0.76
  text "E2" at 58.325,-0.45 h0.76
  text "C5" at 15.325,-1.55 h0.76
  text "104" at 29.075,-1.55 h0.76
  text "GND" at 58.05,-1.55 h0.76
  text "E1" at 58.325,-2.525 h0.76
  text "C6" at 25.375,-2.9 h0.76
  text "C13" at -23.1,-2.975 h0.76
  text "E0" at 58.3,-3.8 h0.76
  text "C7" at 15.275,-4.075 h0.76
  text "GND" at 58.075,-4.875 h0.76
  text "C8" at 25.35,-5.175 h0.76
  text "0R" at -32.575,-5.825 h0.76 r90
  text "104" at 38.375,-6.55 h0.76
  text "LED_W" at 48.075,-6.6 h0.76
  text "1K" at 52.95,-6.6 h0.76
  text "0R" at -42.375,-6.875 h0.76
  text "1K5" at -31.075,-6.95 h0.76
  text "LED_R" at -50.05,-7.025 h0.76
  text "D2" at -28.4,-8.6 h0.76
  text "1K" at -49.525,-9.15 h0.76
  text "0805" at -35.5,-9.375 h0.76
  text "0R" at 68,-9.5 h0.76
  text "0R" at 70.25,-9.525 h0.76
  text "0R" at 45.375,-9.675 h0.76
  text "330uF" at -71.2,-10.825 h0.76
  text "+" at -61.1,-15.175 h0.76 r90
  text "+" at 18.9,-15.175 h0.76 r90
  text "+" at -31.2,-15.2 h0.76 r90
  text "+" at 48.925,-15.225 h0.76 r90
  text "10uF" at -66.55,-15.65 h0.76 r90
  text "10uF" at 13.425,-15.65 h0.76 r90
  text "10uF" at 43.65,-15.65 h0.76 r90
  text "10uF" at -36.425,-15.7 h0.76 r90
  text "D3.3V" at -13.025,-15.85 h0.76 r90
  text "D3.3V" at 36.95,-15.85 h0.76 r90
  text "D3.3V" at -42.925,-15.9 h0.76 r90
  text "D3.3V" at 67.1,-15.9 h0.76 r90
  text "10K" at 6.6,-15.925 h0.76
  text "10K" at 4.25,-15.95 h0.76
  text "10K" at -7.575,-16.025 h0.76
  text "10K" at -5.225,-16.05 h0.76
  text "10K" at 36.95,-17.7 h0.76 r90
  text "10K" at -42.925,-17.725 h0.76 r90
  text "10K" at -13.025,-17.825 h0.76 r90
  text "10K" at 67.1,-17.85 h0.76 r90
  text "470R" at -66.6,-17.925 h0.76 r90
  text "104" at -40.325,-18 h0.76 r90
  text "104" at -39.4,-18 h0.76 r90
  text "510R" at 43.625,-18.025 h0.76 r90
  text "104" at 39.925,-18.05 h0.76 r90
  text "104" at 40.8,-18.05 h0.76 r90
  text "510R" at -36.425,-18.1 h0.76 r90
  text "470R" at 13.425,-18.125 h0.76 r90
  text "104" at 39.45,-19.975 h0.76
  text "104" at -40.475,-20 h0.76
  text "10K" at -42.95,-20.075 h0.76 r90
  text "10K" at 36.95,-20.075 h0.76 r90
  text "10K" at -13.025,-20.225 h0.76 r90
  text "510R" at -36.475,-20.3 h0.76 r90
  text "10K" at 67.1,-20.325 h0.76 r90
  text "510R" at 43.625,-20.35 h0.76 r90
  text "510R" at 13.425,-20.375 h0.76 r90
  text "510R" at -66.65,-20.425 h0.76 r90
  text "0R" at -10.725,-23.05 h0.76 r90
  text "104" at -5.9,-23.325 h0.76 r90
Top Solder:
  drawing of 2348 lines, arcs and shapes, not listed
Mechanical 15:
  lines w1: -72.525,-31 72.475,31 ; -72.525,31 72.475,-31 ; -13.472,-10.226 13.452,10.221 ; -13.472,10.221 13.452,-10.226 ; 0,12.275 0,50

## Text inside footprints (layer, text, board x,y; h text height)
C22: Top Overlay "+" at -64.182,-8.41 h2 r90
USB1: Mechanical 1 "PCB Edge" at 72.273,12.198 h0.25 r90